# EAGLE board CT_schematic (EAGLE 7.6.0)

Size 100 x 80 mm. Coordinates in mm from the lower left corner, seen from the top.
Outline: 0,0 100,0 100,80 0,80 0,0
Copper layers (1*16): Top 0.035mm / dielectric 1.5mm / Bottom 0.035mm
Design rules "default": minimum track width 10mil, minimum drill 24mil, track to track 8mil, track to pad 8mil, pad to pad 8mil, via to via 8mil, smd to smd 8mil, copper to edge 40mil, drill to drill 8mil, minimum pad ring 10mil, minimum via ring 8mil, stop-mask expansion 4mil, vias tented up to drill 0mil, thermal gap 10mil

## Footprints (pad centres in the part's own frame; a part is rotated, then mirrored left to right if it is on the bottom)
C0603 = smd 0.8 x 0.8: 1 -0.762,0; 2 0.762,0
C0402 = smd 0.5 x 0.5: 1 -0.508,0; 2 0.508,0
C0805 = smd 1.2 x 1.3: 1 -1.016,0; 2 1.016,0
EXV-9B = smd 2.718 x 1.778: 1 -2.108,0; 2 2.108,0
C1206 = smd 1.3 x 1.6: 1 -1.524,0; 2 1.524,0
DR1040 = smd 1.6 x 3.2: 1 -4.458,0; 2 4.458,0
R0603 = smd 0.8 x 0.8: 1 -0.762,0; 2 0.762,0
LQFP64 = smd 0.3 x 1.2: 1 -3.75,-5.75; 2 -3.25,-5.75; 3 -2.75,-5.75; 4 -2.25,-5.75; 5 -1.75,-5.75; 6 -1.25,-5.75; 7 -0.75,-5.75; 8 -0.25,-5.75; 9 0.25,-5.75; 10 0.75,-5.75; 11 1.25,-5.75; 12 1.75,-5.75; 13 2.25,-5.75; 14 2.75,-5.75; 15 3.25,-5.75; 16 3.75,-5.75; 33 3.75,5.75; 34 3.25,5.75; 35 2.75,5.75; 36 2.25,5.75; 37 1.75,5.75; 38 1.25,5.75; 39 0.75,5.75; 40 0.25,5.75; 41 -0.25,5.75; 42 -0.75,5.75; 43 -1.25,5.75; 44 -1.75,5.75; 45 -2.25,5.75; 46 -2.75,5.75; 47 -3.25,5.75; 48 -3.75,5.75 | smd 1.2 x 0.3: 17 5.75,-3.75; 18 5.75,-3.25; 19 5.75,-2.75; 20 5.75,-2.25; 21 5.75,-1.75; 22 5.75,-1.25; 23 5.75,-0.75; 24 5.75,-0.25; 25 5.75,0.25; 26 5.75,0.75; 27 5.75,1.25; 28 5.75,1.75; 29 5.75,2.25; 30 5.75,2.75; 31 5.75,3.25; 32 5.75,3.75; 49 -5.75,3.75; 50 -5.75,3.25; 51 -5.75,2.75; 52 -5.75,2.25; 53 -5.75,1.75; 54 -5.75,1.25; 55 -5.75,0.75; 56 -5.75,0.25; 57 -5.75,-0.25; 58 -5.75,-0.75; 59 -5.75,-1.25; 60 -5.75,-1.75; 61 -5.75,-2.25; 62 -5.75,-2.75; 63 -5.75,-3.25; 64 -5.75,-3.75
SSOP-28 = smd 1.5 x 0.4: 1 -3.625,4.225; 2 -3.625,3.575; 3 -3.625,2.925; 4 -3.625,2.275; 5 -3.625,1.625; 6 -3.625,0.975; 7 -3.625,0.325; 8 -3.625,-0.325; 9 -3.625,-0.975; 10 -3.625,-1.625; 11 -3.625,-2.275; 12 -3.625,-2.925; 13 -3.625,-3.575; 14 -3.625,-4.225; 15 3.625,-4.225; 16 3.625,-3.575; 17 3.625,-2.925; 18 3.625,-2.275; 19 3.625,-1.625; 20 3.625,-0.975; 21 3.625,-0.325; 22 3.625,0.325; 23 3.625,0.975; 24 3.625,1.625; 25 3.625,2.275; 26 3.625,2.925; 27 3.625,3.575; 28 3.625,4.225
FCI_10118193-0001LF = smd 0.4 x 1.35: 1 -1.3,2.675; 2 -0.65,2.675; 3 0,2.675; 4 0.65,2.675; 5 1.3,2.675 | smd 1.6 x 1.4: 6 -3.2,2.45; 7 3.2,2.45 | smd 1.9 x 1.9: 8 -1.2,0; 9 1.2,0 | hole 0.5: -3.3,0; 3.3,0
SAMTEC_FTSH-105-01-L-DV-K = smd 0.762 x 2.794: 1 -2.54,-2.032; 2 -2.54,2.032; 3 -1.27,-2.032; 4 -1.27,2.032; 5 0,-2.032; 6 0,2.032; 7 1.27,-2.032; 8 1.27,2.032; 9 2.54,-2.032; 10 2.54,2.032
USON-8 = smd 0.3 x 0.4: 1 0,0; 2 0.5,0; 3 1,0; 4 1.5,0; 5 1.5,2.4; 6 1,2.4; 7 0.5,2.4; 8 0,2.4 | smd 1.65 x 0.25: 9 0.75,1.2
SOT143B = smd 1 x 0.7: 1 -0.75,-1 | smd 0.6 x 0.7: 2 0.95,-1; 3 0.95,1; 4 -0.95,1
ASEK = smd 1.4 x 1: 1 -1.1,-0.8; 2 1.1,-0.8; 3 1.1,0.8; 4 -1.1,0.8
ASFL1 = smd 1.7 x 1.5: 1 -1.27,-1.1; 2 1.27,-1.1; 3 1.27,1.1; 4 -1.27,1.1
LP2954 = smd 1.6 x 0.6: 1 -2.475,1.905 | smd 1.55 x 0.6: 2 -2.475,0.635; 3 -2.475,-0.635; 4 -2.475,-1.905; 5 2.475,-1.905; 6 2.475,-0.635; 7 2.475,0.635; 8 2.475,1.905
TSOT-23-5 = smd 1.3 x 0.62: 1 -1.31,0.95; 2 -1.31,0; 3 -1.31,-0.95; 4 1.31,-0.95; 5 1.31,0.95
DFN8_2X3MC = smd 0.813 x 0.305: 1 -1.398,0.75; 2 -1.398,0.25; 3 -1.398,-0.25; 4 -1.398,-0.75; 5 1.398,-0.75; 6 1.398,-0.25; 7 1.398,0.25; 8 1.398,0.75 | smd 1.753 x 1.549: 9 0,0
JST-2-SMD = smd 1 x 4.6: 1 -1,-3.7; 2 1,-3.7 | smd 1.6 x 3.4: NC1 -3.4,1.5; NC2 3.4,1.5
SON-6 = smd 0.55 x 0.3: 1 -0.355,0.5 | smd 0.52 x 0.3: 2 -0.37,0; 3 -0.37,-0.5; 4 0.37,-0.5; 5 0.37,0; 6 0.37,0.5
SW_4-1437565-2 = smd 1.4 x 2.1: 1 -2.23,4.55; 2 -2.23,-4.55; 3 2.23,4.55; 4 2.23,-4.55
LGM67K-G1J2-24-Z = smd 0.8 x 1.4: A -2,0; C 0,0
NC7SZ125M5X = smd 1.3 x 0.7: 1 -1.3,0.95; 2 -1.3,0; 3 -1.3,-0.95; 4 1.3,-0.95; 5 1.3,0.95

## Placement (x,y rotation side)
C1  1e-06  [C0603]  -63.5,60.96 0 top  (outside the outline)
C2  1e-07  [C0603]  -67.31,60.96 0 top  (outside the outline)
C3  1e-07  [C0603]  -71.12,60.96 0 top  (outside the outline)
C4  1e-07  [C0603]  -15.24,66.04 0 top  (outside the outline)
C5  1e-07  [C0603]  -19.05,66.04 0 top  (outside the outline)
C6  1e-07  [C0603]  -22.86,66.04 0 top  (outside the outline)
C7  4.7e-06  [C0603]  -59.69,60.96 0 top  (outside the outline)
C8  1e-07  [C0603]  -26.67,66.04 0 top  (outside the outline)
C9  1e-08  [C0603]  -30.48,66.04 0 top  (outside the outline)
C10  1e-06  [C0603]  -34.29,66.04 0 top  (outside the outline)
C11  1e-07  [C0402]  -57.15,66.04 0 top  (outside the outline)
C12  4.7e-06  [C0805]  -45.72,49.53 0 top  (outside the outline)
C13  1e-07  [C0402]  -60.96,66.04 0 top  (outside the outline)
C14  1e-07  [C0402]  -64.77,66.04 0 top  (outside the outline)
C15  1e-07  [C0402]  -68.58,66.04 0 top  (outside the outline)
C16  1e-07  [C0402]  -72.39,66.04 0 top  (outside the outline)
C17  1e-08  [C0402]  -15.24,71.12 0 top  (outside the outline)
C18  1e-08  [C0402]  -19.05,71.12 0 top  (outside the outline)
C19  1e-08  [C0402]  -22.86,71.12 0 top  (outside the outline)
C20  1e-06  [EXV-9B]  -16.51,49.53 0 top  (outside the outline)
C21  2.2e-06  [EXV-9B]  -25.4,49.53 0 top  (outside the outline)
C22  1e-05  [C0805]  -50.8,49.53 0 top  (outside the outline)
C23  1e-05  [C0805]  -55.88,49.53 0 top  (outside the outline)
C24  1e-07  [C0402]  -26.67,71.12 0 top  (outside the outline)
C25  1e-05  [C1206]  -59.69,40.64 0 top  (outside the outline)
C26  1e-05  [C1206]  -66.04,40.64 0 top  (outside the outline)
C27  1e-08  [C0402]  -30.48,71.12 0 top  (outside the outline)
C28  1e-08  [C0402]  -34.29,71.12 0 top  (outside the outline)
I1  2.5e-06  [DR1040]  -38.1,21.59 0 top  (outside the outline)
R2  1000.0  [R0603]  -38.1,66.04 0 top  (outside the outline)
R4  4700.0  [R0603]  -41.91,66.04 0 top  (outside the outline)
R5  10000.0  [R0603]  -60.96,55.88 0 top  (outside the outline)
R6  4700.0  [R0603]  -45.72,66.04 0 top  (outside the outline)
R7  10000.0  [R0603]  -66.04,55.88 0 top  (outside the outline)
R8  10000.0  [R0603]  -71.12,55.88 0 top  (outside the outline)
R9  10000.0  [R0603]  -15.24,60.96 0 top  (outside the outline)
R10  10000.0  [R0603]  -20.32,60.96 0 top  (outside the outline)
R11  10000.0  [R0603]  -25.4,60.96 0 top  (outside the outline)
R12  10000.0  [R0603]  -30.48,60.96 0 top  (outside the outline)
R13  5.0  [R0603]  -49.53,66.04 0 top  (outside the outline)
R14  100000.0  [R0603]  -15.24,55.88 0 top  (outside the outline)
R15  100000.0  [R0603]  -20.32,55.88 0 top  (outside the outline)
R16  100000.0  [R0603]  -25.4,55.88 0 top  (outside the outline)
R17  100000.0  [R0603]  -30.48,55.88 0 top  (outside the outline)
R18  100000.0  [R0603]  -35.56,55.88 0 top  (outside the outline)
R19  47000.0  [R0603]  -35.56,60.96 0 top  (outside the outline)
R20  100000.0  [R0603]  -40.64,55.88 0 top  (outside the outline)
R21  220000.0  [R0603]  -45.72,55.88 0 top  (outside the outline)
R22  1000000.0  [R0603]  -68.58,49.53 0 top  (outside the outline)
R23  10000.0  [R0603]  -40.64,60.96 0 top  (outside the outline)
R24  10000.0  [R0603]  -45.72,60.96 0 top  (outside the outline)
R25  82000.0  [R0603]  -50.8,60.96 0 top  (outside the outline)
R26  300000.0  [R0603]  -50.8,55.88 0 top  (outside the outline)
R27  120000.0  [R0603]  -55.88,55.88 0 top  (outside the outline)
R28  2000.0  [R0603]  -53.34,66.04 0 top  (outside the outline)
R29  10000.0  [R0603]  -55.88,60.96 0 top  (outside the outline)
U1  STM32L486RGT6  [LQFP64]  -67.31,7.62 0 top  (outside the outline)
U2  FT232RL-REEL  [SSOP-28]  -20.32,7.62 0 top  (outside the outline)
U3  10118193-0001LF  [FCI_10118193-0001LF]  -68.58,31.75 0 top  (outside the outline)
U4  FTSH-105-01-L-DV-K  [SAMTEC_FTSH-105-01-L-DV-K]  -49.53,7.62 0 top  (outside the outline)
U5  SST26WF040BT-104I/NP  [USON-8]  -38.1,69.85 0 top  (outside the outline)
U6  10118193-0001LF  [FCI_10118193-0001LF]  -19.05,41.91 0 top  (outside the outline)
U7  prtr5v0u2ax  [SOT143B]  -50.8,71.12 0 top  (outside the outline)
U8  ASEK-32.768KHz-ECST  [ASEK]  -40.64,41.91 0 top  (outside the outline)
U9  ASFL1-12MHZ-NCS  [ASFL1]  -43.18,31.75 0 top  (outside the outline)
U10  ASFL1-25MHZ-NCS  [ASFL1]  -59.69,31.75 0 top  (outside the outline)
U11  LP2954AIMX/NOPB  [LP2954]  -25.4,33.02 0 top  (outside the outline)
U12  ltc3406es5  [TSOT-23-5]  -60.96,49.53 0 top  (outside the outline)
U13  MCP73831T-2ACI/MC  [DFN8_2X3MC]  -60.96,69.85 0 top  (outside the outline)
U14  S2B-PH-SM4-TB(LF)(SN)  [JST-2-SMD]  -53.34,21.59 0 top  (outside the outline)
U15  TPS3895ADRYR  [SON-6]  -54.61,69.85 0 top  (outside the outline)
U16  4-1437565-2  [SW_4-1437565-2]  -27.94,21.59 0 top  (outside the outline)
U17  Q65110A2395  [LGM67K-G1J2-24-Z]  -48.26,40.64 0 top  (outside the outline)
U18  nc7sz125m5x  [NC7SZ125M5X]  -33.02,49.53 0 top  (outside the outline)
U19  nc7sz125m5x  [NC7SZ125M5X]  -39.37,49.53 0 top  (outside the outline)

## Library data of the parts
C1-C28 I1 R2 R4-R29 U1-U19 = circuit_tree

## Nets
CLK_U1_3: U1.3 U8.3
CLK_U1_5: U1.5 U10.3
CLK_U2_27: U2.27 U9.3
GND: C1.2 C2.2 C3.2 C4.2 C5.2 C6.2 C7.2 C8.2 C9.2 C10.2 C11.2 C12.2 C13.2 C14.2 C15.2 C16.2 C17.2 C18.2 C19.2 C20.2 C21.2 C22.2 C23.1 C23.2 C24.2 C25.2 C26.2 C27.2 C28.2 R2.2 R5.2 R8.2 R12.2 R13.2 R20.2 R21.2 R25.2 R27.2 R28.2 U1.12 U1.18 U1.31 U1.47 U1.63 U2.7 U2.18 U2.21 U2.25 U2.26 U3.5 U3.6 U3.7 U3.8 U3.9 U4.3 U4.5 U5.4 U5.9 U6.5 U6.6 U6.7 U6.8 U6.9 U7.1 U8.2 U9.2 U10.2 U11.4 U12.2 U13.6 U13.9 U14.2 U15.2 U17.C U18.2 U18.3 U19.1 U19.3
INPUT_USBPOWER_5V: C25.1 R6.1 R29.2 U3.1 U13.1 U13.2
NET_U1_7: R4.1 U1.7 U19.4
NET_U1_60: R5.1 U1.60
NET_U1_61: U17.A
NET_U1_62: U16.3 U16.4
NET_U2_14: R7.1 U2.14
NET_U2_17: C13.1 U2.17
NET_U2_19: R8.1 U2.19
NET_U3_2: U2.16 U3.2
NET_U3_3: U2.15 U3.3
NET_U3_19: R6.2
NET_U4_9: R13.1 U4.9
NET_U11_3: R18.1 U11.3
NET_U11_5: R17.1 U11.5
NET_U11_7: R19.2 R20.1 U11.7
NET_U12_1: U12.1
NET_U12_3: I1.1 U12.3
NET_U12_5: R21.1 R22.1 U12.5
NET_U12_ATNET_3: I1.2 R22.2
NET_U13_5: R29.1 U13.5
NET_U13_8: R28.1 U13.8
NET_U15_1: R24.1 R25.1 U15.1
NET_U15_3: R26.2 R27.1 U15.3
NET_U15_4: R23.1 U15.4 U18.4 U19.2
NET_U16_1: R2.1 U16.1 U16.2
PROC_LPUART1_CTS: U1.34 U2.3
PROC_LPUART1_RTS: U1.33 U2.11
PROC_LPUART1_RX: U1.8 U2.1
PROC_LPUART1_TX: U1.9 U2.5
PROC_QUADSPI_BK1_IO0: U1.27 U5.5
PROC_QUADSPI_BK1_IO1: U1.26 U5.2
PROC_QUADSPI_BK1_IO2: R15.1 U1.23 U5.3
PROC_QUADSPI_BK1_IO3: R16.1 U1.22 U5.7
PROC_QUADSPI_CLK: U1.29 U5.6
PROC_QUADSPI_NCS: R14.1 U1.30 U5.1
PROC_SYS_JTCK_SWCLK: R12.1 U1.49 U4.4
PROC_SYS_JTDI: R10.1 U1.50 U4.8
PROC_SYS_JTDO_SWO: U1.55 U4.6
PROC_SYS_JTMS_SWDIO: R11.1 U1.46 U4.2
PROC_USB_OTG_FS_DM: U1.44 U6.2 U7.3
PROC_USB_OTG_FS_DP: U1.45 U6.3 U7.2
PROC_USB_OTG_FS_VBUS: U1.42 U6.1 U7.4
RST_OUT_U4_JTAG_RST_B: R9.1 U4.10 U18.1
VCC_S1_3V7: C20.1 C22.1 C26.1 R18.2 U11.8 U12.4 U13.3 U13.4 U14.1
VCC_TIER1_1V8: C1.1 C2.1 C3.1 C4.1 C5.1 C6.1 C7.1 C9.1 C10.1 C14.1 C15.1 C16.1 C21.1 C24.1 C27.1 C28.1 R4.2 R9.2 R10.2 R11.2 R14.2 R15.2 R16.2 R17.2 R19.1 R23.2 R24.2 R26.1 U1.1 U1.13 U1.19 U1.32 U1.64 U2.4 U4.1 U5.8 U11.1 U15.6 U18.5 U19.5
VCC_TIER1_3V3: C8.1 C11.1 C12.1 C17.1 C18.1 C19.1 C23.2 I1.2 R7.2 R22.2 U1.48 U2.20 U8.4 U9.4 U10.4

## Tracks (layer width: path | path; a pad name or v marks a point on that pad's centre or on a via)
CLK_U1_3  (1 unrouted)
CLK_U1_5  (1 unrouted)
CLK_U2_27  (1 unrouted)
GND  (77 unrouted)
INPUT_USBPOWER_5V  (5 unrouted)
NET_U1_7  (2 unrouted)
NET_U1_60  (1 unrouted)
NET_U1_62  (1 unrouted)
NET_U2_14  (1 unrouted)
NET_U2_17  (1 unrouted)
NET_U2_19  (1 unrouted)
NET_U3_2  (1 unrouted)
NET_U3_3  (1 unrouted)
NET_U4_9  (1 unrouted)
NET_U11_3  (1 unrouted)
NET_U11_5  (1 unrouted)
NET_U11_7  (2 unrouted)
NET_U12_3  (1 unrouted)
NET_U12_5  (2 unrouted)
NET_U12_ATNET_3  (1 unrouted)
NET_U13_5  (1 unrouted)
NET_U13_8  (1 unrouted)
NET_U15_1  (2 unrouted)
NET_U15_3  (2 unrouted)
NET_U15_4  (3 unrouted)
NET_U16_1  (2 unrouted)
PROC_LPUART1_CTS  (1 unrouted)
PROC_LPUART1_RTS  (1 unrouted)
PROC_LPUART1_RX  (1 unrouted)
PROC_LPUART1_TX  (1 unrouted)
PROC_QUADSPI_BK1_IO0  (1 unrouted)
PROC_QUADSPI_BK1_IO1  (1 unrouted)
PROC_QUADSPI_BK1_IO2  (2 unrouted)
PROC_QUADSPI_BK1_IO3  (2 unrouted)
PROC_QUADSPI_CLK  (1 unrouted)
PROC_QUADSPI_NCS  (2 unrouted)
PROC_SYS_JTCK_SWCLK  (2 unrouted)
PROC_SYS_JTDI  (2 unrouted)
PROC_SYS_JTDO_SWO  (1 unrouted)
PROC_SYS_JTMS_SWDIO  (2 unrouted)
PROC_USB_OTG_FS_DM  (2 unrouted)
PROC_USB_OTG_FS_DP  (2 unrouted)
PROC_USB_OTG_FS_VBUS  (2 unrouted)
RST_OUT_U4_JTAG_RST_B  (2 unrouted)
VCC_S1_3V7  (8 unrouted)
VCC_TIER1_1V8  (39 unrouted)
VCC_TIER1_3V3  (14 unrouted)